# EAGLE board CAA-NMC-2-panels (EAGLE 9.2.2)
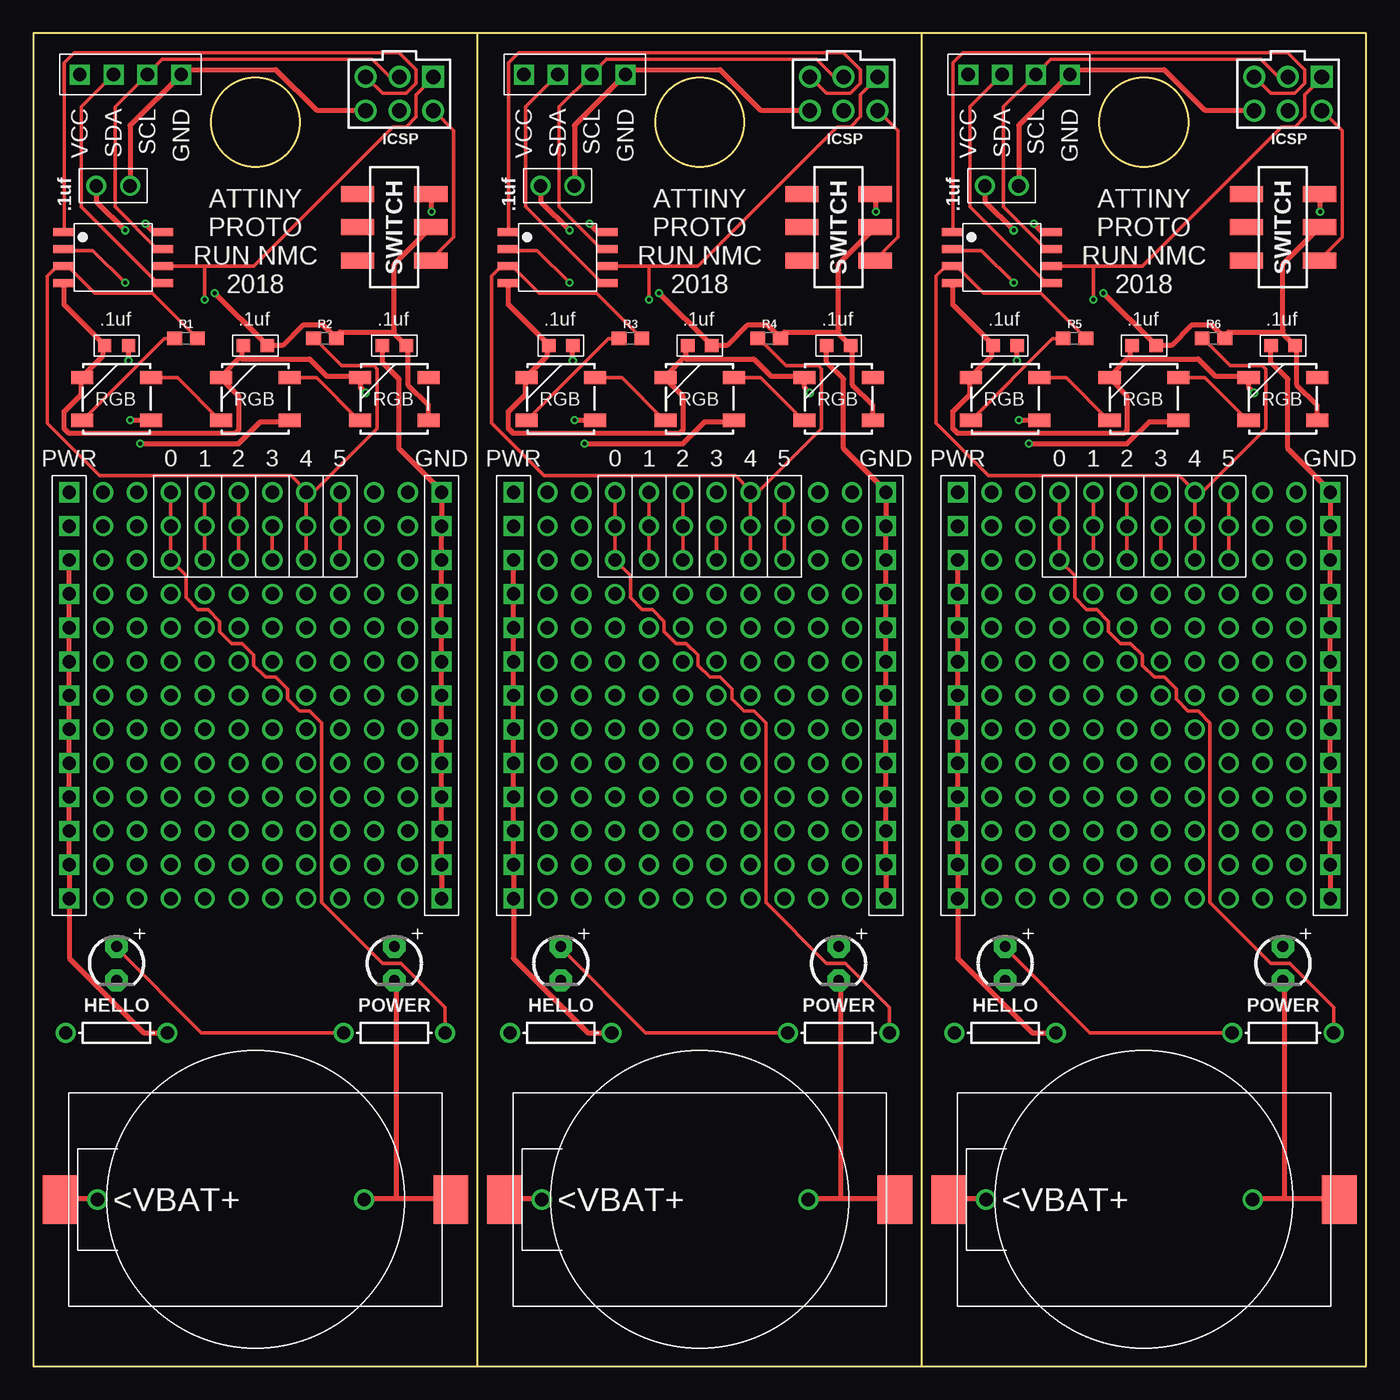
[diagram p0: board, top side]
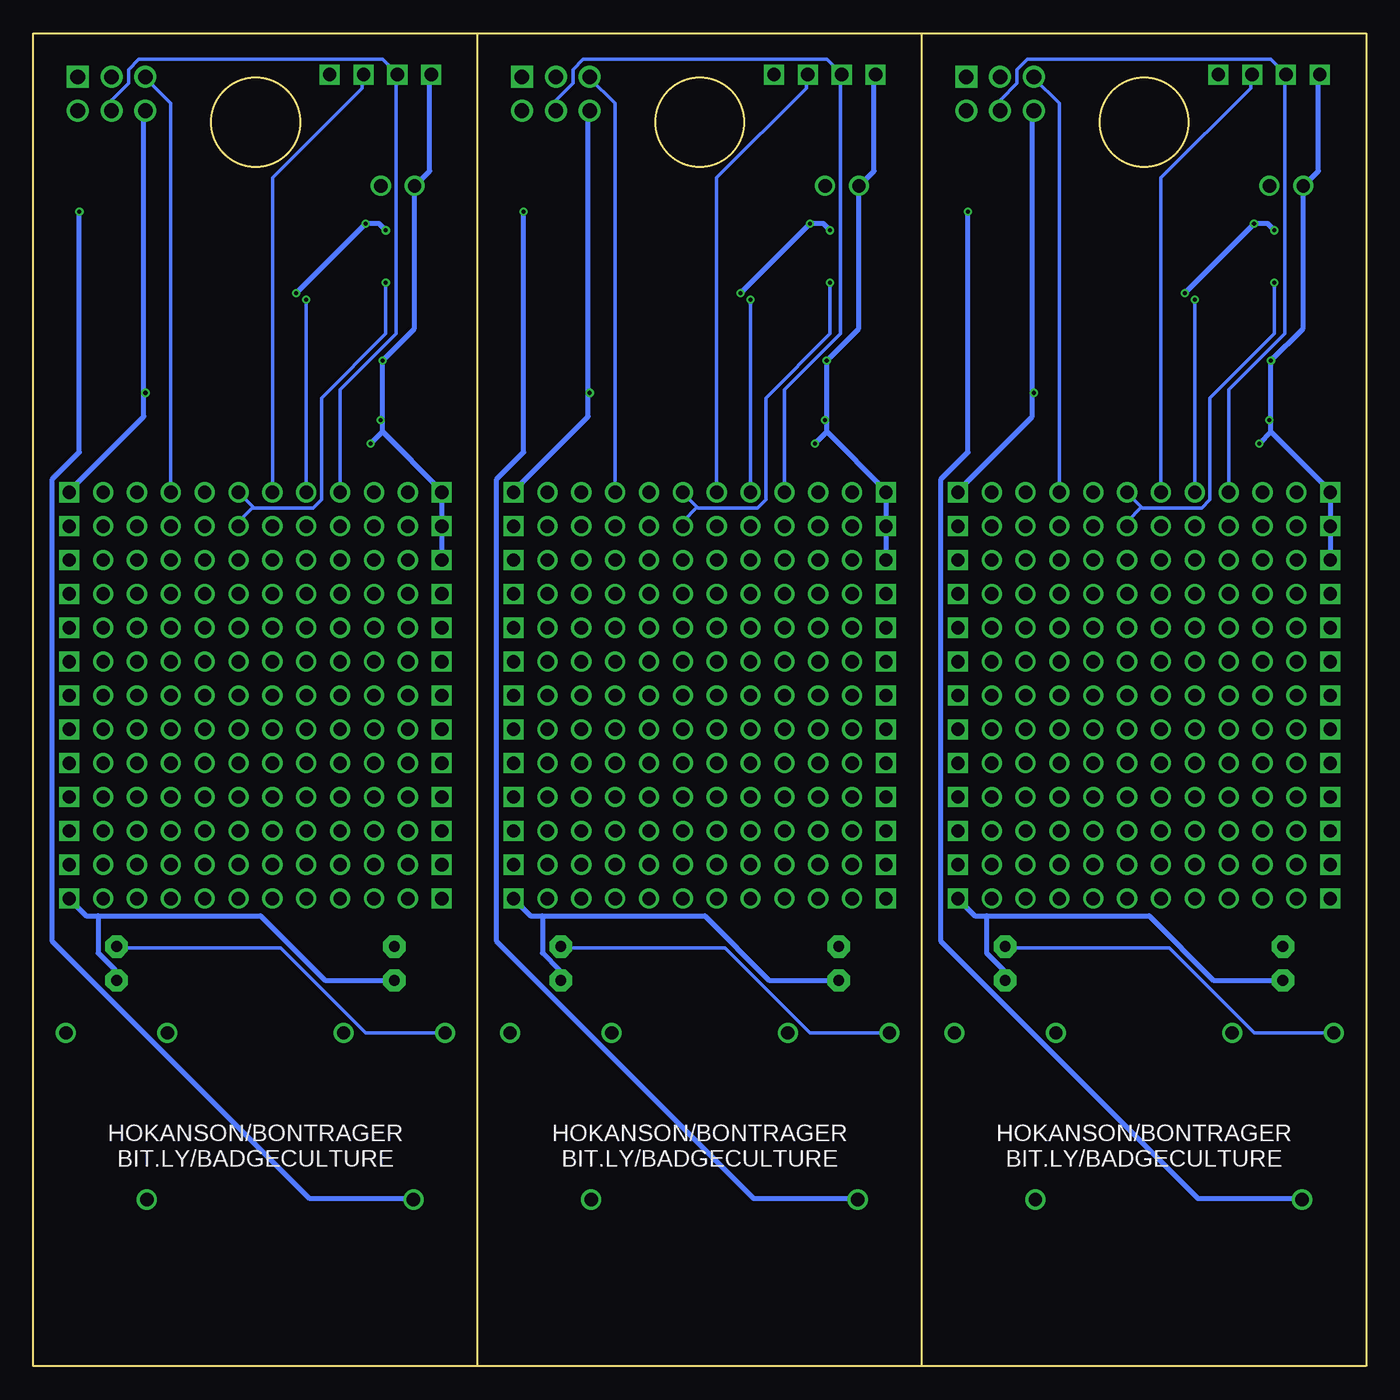
[diagram p1: board, bottom side, seen from below]

Size 100 x 100 mm. Coordinates in mm from the lower left corner, seen from the top.
Outline: 33.33,0 33.33,100
Outline: 66.67,0 66.67,100
Outline: 0,0 100,0 100,100 0,100 0,0
Outline: circle at 16.66,93.32 radius 3.33
Outline: circle at 50,93.32 radius 3.33
Outline: circle at 83.33,93.32 radius 3.33
Copper layers (1*16): Top 0.035mm / dielectric 1.5mm / Bottom 0.035mm
Design rules "SeeedStudio_2layer_DRU_no_angle_20140221": minimum track width 6mil, minimum drill 12mil, track to track 6mil, track to pad 6mil, pad to pad 6mil, via to via 6mil, smd to smd 0mil, copper to edge 10mil, drill to drill 10mil, minimum pad ring 10mil, minimum via ring 6mil, stop-mask expansion 2mil, vias tented up to drill 100mil, thermal gap 10mil
Net classes: 0 default: width 0.254 mm, clearance 0.254 mm; 1 VCC: width 0.381 mm, clearance 0.254 mm; 2 GND: width 0.381 mm, clearance 0.254 mm; 3 VBAT: width 0.381 mm, clearance 0.254 mm

## Footprints (pad centres in the part's own frame; a part is rotated, then mirrored left to right if it is on the bottom)
WS2812B = smd 1 x 1: CAP1 -0.9,4; CAP2 0.9,4 | smd 1.651 x 1: DI -2.577,-1.6; DO 2.577,1.6; GND -2.577,1.6; VCC 2.577,-1.6
LED3MM = drill 0.813 pad 1.676 octagon: NEG 1.27,0; POS -1.27,0
SOT127P798X216-8N = smd 1.5 x 0.6: GND -3.75,-1.905; PB0 3.75,-1.905; PB1 3.75,-0.635; PB2 3.75,0.635; PB3 -3.75,0.635; PB4 -3.75,-0.635; PB5 -3.75,1.905; VCC 3.75,1.905
HDRV6W64P254_2X3_762X508X868P = drill 1.1 pad 1.65: 0/MOSI/SDA 0,1.27; 2/SCK/SCL 0,3.81; 5/RST -2.54,3.81; GND -2.54,1.27; VCC 2.54,1.27 | drill 1.1 pad 1.65 square: 1/MISO 2.54,3.81
0603 = smd 1.1 x 1: 1 -0.85,0; 2 0.85,0
PROTO = drill 1: 0A -6.35,30.48; 0B -6.35,27.94; 0C -6.35,25.4; 1A -3.81,30.48; 1B -3.81,27.94; 1C -3.81,25.4; 2A -1.27,30.48; 2B -1.27,27.94; 2C -1.27,25.4; 3A 1.27,30.48; 3B 1.27,27.94; 3C 1.27,25.4; 4A 3.81,30.48; 4B 3.81,27.94; 4C 3.81,25.4; 5A 6.35,30.48; 5B 6.35,27.94; 5C 6.35,25.4; VSTRIP1 -8.89,22.86; VSTRIP2 -8.89,20.32; VSTRIP3 -8.89,17.78; VSTRIP4 -8.89,15.24; VSTRIP5 -8.89,12.7; VSTRIP6 -6.35,22.86; VSTRIP7 -6.35,20.32; VSTRIP8 -6.35,17.78; VSTRIP9 -6.35,15.24; VSTRIP10 -6.35,12.7; VSTRIP11 -11.43,10.16; VSTRIP12 -11.43,7.62; VSTRIP13 -11.43,5.08; VSTRIP14 -11.43,2.54; VSTRIP15 -11.43,0; VSTRIP16 -3.81,22.86; VSTRIP17 -3.81,20.32; VSTRIP18 -3.81,17.78; VSTRIP19 -3.81,15.24; VSTRIP20 -3.81,12.7; VSTRIP21 -1.27,22.86; VSTRIP22 -1.27,20.32; VSTRIP23 -1.27,17.78; VSTRIP24 -1.27,15.24; VSTRIP25 -1.27,12.7; VSTRIP26 1.27,22.86; VSTRIP27 1.27,20.32; VSTRIP28 1.27,17.78; VSTRIP29 1.27,15.24; VSTRIP30 1.27,12.7; VSTRIP31 3.81,22.86; VSTRIP32 3.81,20.32; VSTRIP33 3.81,17.78; VSTRIP34 3.81,15.24; VSTRIP35 3.81,12.7; VSTRIP36 6.35,22.86; VSTRIP37 6.35,20.32; VSTRIP38 6.35,17.78; VSTRIP39 6.35,15.24; VSTRIP40 6.35,12.7; VSTRIP41 8.89,22.86; VSTRIP42 8.89,20.32; VSTRIP43 8.89,17.78; VSTRIP44 8.89,15.24; VSTRIP45 8.89,12.7; VSTRIP46 11.43,22.86; VSTRIP47 11.43,20.32; VSTRIP48 11.43,17.78; VSTRIP49 11.43,15.24; VSTRIP50 11.43,12.7; VSTRIP51 -11.43,22.86; VSTRIP52 -11.43,20.32; VSTRIP53 -11.43,17.78; VSTRIP54 -11.43,15.24; VSTRIP55 -8.89,10.16; VSTRIP56 -8.89,7.62; VSTRIP57 -8.89,5.08; VSTRIP58 -8.89,2.54; VSTRIP59 -8.89,0; VSTRIP60 -11.43,12.7; VSTRIP61 -8.89,30.48; VSTRIP62 -8.89,27.94; VSTRIP63 -8.89,25.4; VSTRIP64 -11.43,30.48; VSTRIP65 -11.43,27.94; VSTRIP66 -11.43,25.4; VSTRIP67 8.89,30.48; VSTRIP68 8.89,27.94; VSTRIP69 8.89,25.4; VSTRIP70 11.43,30.48; VSTRIP71 11.43,27.94; VSTRIP72 11.43,25.4; VSTRIP75 -6.35,10.16; VSTRIP76 -6.35,7.62; VSTRIP77 -6.35,5.08; VSTRIP78 -6.35,2.54; VSTRIP79 -6.35,0; VSTRIP95 -3.81,10.16; VSTRIP96 -3.81,7.62; VSTRIP97 -3.81,5.08; VSTRIP98 -3.81,2.54; VSTRIP99 -3.81,0; VSTRIP115 -1.27,10.16; VSTRIP116 -1.27,7.62; VSTRIP117 -1.27,5.08; VSTRIP118 -1.27,2.54; VSTRIP119 -1.27,0; VSTRIP135 1.27,10.16; VSTRIP136 1.27,7.62; VSTRIP137 1.27,5.08; VSTRIP138 1.27,2.54; VSTRIP139 1.27,0; VSTRIP155 3.81,10.16; VSTRIP156 3.81,7.62; VSTRIP157 3.81,5.08; VSTRIP158 3.81,2.54; VSTRIP159 3.81,0; VSTRIP175 6.35,10.16; VSTRIP176 6.35,7.62; VSTRIP177 6.35,5.08; VSTRIP178 6.35,2.54; VSTRIP179 6.35,0; VSTRIP195 8.89,10.16; VSTRIP196 8.89,7.62; VSTRIP197 8.89,5.08; VSTRIP198 8.89,2.54; VSTRIP199 8.89,0; VSTRIP215 11.43,10.16; VSTRIP216 11.43,7.62; VSTRIP217 11.43,5.08; VSTRIP218 11.43,2.54; VSTRIP219 11.43,0 | drill 1 square: GND0 13.97,0; GND1 13.97,2.54; GND2 13.97,5.08; GND3 13.97,7.62; GND4 13.97,10.16; GND5 13.97,12.7; GND6 13.97,15.24; GND7 13.97,17.78; GND8 13.97,20.32; GND9 13.97,22.86; GND10 13.97,25.4; GND11 13.97,27.94; GND12 13.97,30.48; PWR0 -13.97,0; PWR1 -13.97,2.54; PWR2 -13.97,5.08; PWR3 -13.97,7.62; PWR4 -13.97,10.16; PWR5 -13.97,12.7; PWR6 -13.97,15.24; PWR7 -13.97,17.78; PWR8 -13.97,20.32; PWR9 -13.97,22.86; PWR10 -13.97,25.4; PWR11 -13.97,27.94; PWR12 -13.97,30.48
SMT-CR-HOLDER = smd 2.6 x 3.65: GND 14.65,0; VBAT -14.65,0
THRU-CR-HOLDER = drill 1: GND 8.15,0; VBAT -11.85,0
I2C-PADS = drill 1 square: GND 0,3.81; SCL 0,1.27; SDA 0,-1.27; VCC 0,-3.81
DECOUPLING_CAP = drill 1: P$1 0,0; P$2 2.54,0
AXIAL-0.3 = drill 1: P$3 -3.81,0; P$4 3.81,0
SMT-SWITCH = smd 1.2 x 2.5: 1 -2.5,-2.75; 2 0,-2.75; 3 2.5,-2.75; 4 -2.5,2.75; 5 0,2.75; 6 2.5,2.75

## Placement (x,y rotation side)
D1  WS2812B  [WS2812B]  6.25,72.57 0 top
D2  WS2812B  [WS2812B]  16.66,72.57 0 top
D3  WS2812B  [WS2812B]  27.09,72.57 0 top
D4  WS2812B  [WS2812B]  39.58,72.57 0 top
D5  WS2812B  [WS2812B]  49.99,72.57 0 top
D6  WS2812B  [WS2812B]  60.42,72.57 0 top
D7  WS2812B  [WS2812B]  72.92,72.57 0 top
D8  WS2812B  [WS2812B]  83.33,72.57 0 top
D9  WS2812B  [WS2812B]  93.75,72.57 0 top
HELLO  LED3MM  [LED3MM]  6.25,30.22 270 top
HELLO1  LED3MM  [LED3MM]  39.58,30.22 270 top
HELLO2  LED3MM  [LED3MM]  72.91,30.22 270 top
IC1  ATTINY85-20SU  [SOT127P798X216-8N]  5.99,83.18 0 top
IC2  ATTINY85-20SU  [SOT127P798X216-8N]  39.33,83.18 0 top
IC3  ATTINY85-20SU  [SOT127P798X216-8N]  72.66,83.18 0 top
J1  M20-9980346  [HDRV6W64P254_2X3_762X508X868P]  27.47,92.93 0 top
J2  M20-9980346  [HDRV6W64P254_2X3_762X508X868P]  60.8,92.93 0 top
J3  M20-9980346  [HDRV6W64P254_2X3_762X508X868P]  94.13,92.93 0 top
POWER  LED3MM  [LED3MM]  27.09,30.22 270 top
POWER1  LED3MM  [LED3MM]  60.42,30.22 270 top
POWER2  LED3MM  [LED3MM]  93.75,30.22 270 top
R1  470  [0603]  11.46,77.11 0 top
R2  10k  [0603]  21.88,77.11 0 top
R3  470  [0603]  44.79,77.11 0 top
R4  10k  [0603]  55.21,77.11 0 top
R5  470  [0603]  78.12,77.11 0 top
R6  10k  [0603]  88.54,77.11 0 top
U$1  PROTO  [PROTO]  16.67,35.08 0 top
U$2  SMT-BATTERY-HOLDER  [SMT-CR-HOLDER]  16.67,12.5 0 top
U$3  THRU-CR-HOLDER  [THRU-CR-HOLDER]  16.67,12.5 0 top
U$4  I2C-PADS  [I2C-PADS]  7.29,96.91 270 top
U$5  DECOUPLING_CAP  [DECOUPLING_CAP]  40.59,88.56 180 top
U$6  RESISTOR  [AXIAL-0.3]  39.58,25.01 0 top
U$7  RESISTOR  [AXIAL-0.3]  60.42,25.01 0 top
U$8  SMT-SWITCH  [SMT-SWITCH]  60.42,85.44 270 top
U$9  PROTO  [PROTO]  50,35.08 0 top
U$10  SMT-BATTERY-HOLDER  [SMT-CR-HOLDER]  50,12.5 0 top
U$11  THRU-CR-HOLDER  [THRU-CR-HOLDER]  50,12.5 0 top
U$12  I2C-PADS  [I2C-PADS]  40.62,96.91 270 top
U$13  DECOUPLING_CAP  [DECOUPLING_CAP]  73.93,88.56 180 top
U$14  RESISTOR  [AXIAL-0.3]  72.91,25.01 0 top
U$15  RESISTOR  [AXIAL-0.3]  93.75,25.01 0 top
U$16  SMT-SWITCH  [SMT-SWITCH]  93.75,85.44 270 top
U$17  PROTO  [PROTO]  83.33,35.08 0 top
U$18  SMT-BATTERY-HOLDER  [SMT-CR-HOLDER]  83.33,12.5 0 top
U$19  THRU-CR-HOLDER  [THRU-CR-HOLDER]  83.33,12.5 0 top
U$20  I2C-PADS  [I2C-PADS]  73.95,96.91 270 top
U$123  DECOUPLING_CAP  [DECOUPLING_CAP]  7.26,88.56 180 top
U$126  RESISTOR  [AXIAL-0.3]  6.25,25.01 0 top
U$127  RESISTOR  [AXIAL-0.3]  27.09,25.01 0 top
U$145  SMT-SWITCH  [SMT-SWITCH]  27.09,85.44 270 top

## Library data of the parts
D1-D9 = BadgeParts; PROD_ID: DIO-12503
HELLO HELLO1 HELLO2 POWER POWER1 POWER2 U$1-U$20 U$123 U$126 U$127 U$145 = BadgeParts
IC1-IC3 = BadgeParts; ARROW_PART_NUMBER: ATTINY85-20SU; ARROW_PRICE/STOCK: https://www.arrow.com/en/products/attiny85-20su/microchip-technology; DESCRIPTION: MICROCHIP - ATTINY85-20SU - MICROCONTROLLER MCU, 8 BIT, ATTINY, 20MHZ, SOIC-8; HEIGHT: 2.16mm; MANUFACTURER_NAME: Microchip; MANUFACTURER_PART_NUMBER: ATTINY85-20SU; RS_PART_NUMBER: 1331674; RS_PRICE/STOCK: http://uk.rs-online.com/web/p/products/1331674
J1-J3 = BadgeParts; ARROW_PART_NUMBER: M20-9980346; ARROW_PRICE/STOCK: http://uk.rs-online.com/web/p/products/7457046P; DESCRIPTION: 03+03 DIL Vertical Pin Header HARWIN M20 Series, 2.54mm Pitch 6 Way 2 Row Straight PCB Header, Solder Termination, 3A; HEIGHT: 8.68mm; MANUFACTURER_NAME: HARWIN; MANUFACTURER_PART_NUMBER: M20-9980346; RS_PART_NUMBER: 7457046P; RS_PRICE/STOCK: http://uk.rs-online.com/web/p/products/7457046P
R1 R3 R5 = SparkFun-Resistors; PROD_ID: RES-07869
R2 R4 R6 = SparkFun-Resistors; PROD_ID: RES-00824

## Nets
GND [GND]: D1.CAP1 D1.GND D2.CAP1 D2.GND D3.CAP1 D3.GND HELLO.NEG IC1.GND J1.GND POWER.NEG U$1.GND0 U$1.GND1 U$1.GND2 U$1.GND3 U$1.GND4 U$1.GND5 U$1.GND6 U$1.GND7 U$1.GND8 U$1.GND9 U$1.GND10 U$1.GND11 U$1.GND12 U$2.GND U$3.GND U$4.GND U$123.P$1
GND1 [GND]: D4.CAP1 D4.GND D5.CAP1 D5.GND D6.CAP1 D6.GND HELLO1.NEG IC2.GND J2.GND POWER1.NEG U$5.P$1 U$9.GND0 U$9.GND1 U$9.GND2 U$9.GND3 U$9.GND4 U$9.GND5 U$9.GND6 U$9.GND7 U$9.GND8 U$9.GND9 U$9.GND10 U$9.GND11 U$9.GND12 U$10.GND U$11.GND U$12.GND
GND2 [GND]: D7.CAP1 D7.GND D8.CAP1 D8.GND D9.CAP1 D9.GND HELLO2.NEG IC3.GND J3.GND POWER2.NEG U$13.P$1 U$17.GND0 U$17.GND1 U$17.GND2 U$17.GND3 U$17.GND4 U$17.GND5 U$17.GND6 U$17.GND7 U$17.GND8 U$17.GND9 U$17.GND10 U$17.GND11 U$17.GND12 U$18.GND U$19.GND U$20.GND
N$1: POWER.POS U$126.P$3
N$2: HELLO.POS U$127.P$3
N$3: D1.DO D2.DI
N$4: D2.DO D3.DI
N$5: D1.DI R1.1
N$6: POWER1.POS U$6.P$3
N$7: HELLO1.POS U$7.P$3
N$8: D4.DO D5.DI
N$9: D5.DO D6.DI
N$10: D4.DI R3.1
N$11: POWER2.POS U$14.P$3
N$12: HELLO2.POS U$15.P$3
N$13: D7.DO D8.DI
N$14: D8.DO D9.DI
N$15: D7.DI R5.1
PB0: IC1.PB0 J1.0/MOSI/SDA U$1.0A U$1.0B U$1.0C U$4.SDA U$127.P$4
PB1: IC1.PB1 J1.1/MISO U$1.1A U$1.1B U$1.1C
PB2: IC1.PB2 J1.2/SCK/SCL U$1.2A U$1.2B U$1.2C U$4.SCL
PB3: IC1.PB3 U$1.3A U$1.3B U$1.3C
PB4: IC1.PB4 R1.2 R2.1 U$1.4A U$1.4B U$1.4C
PB5: IC1.PB5 J1.5/RST U$1.5A U$1.5B U$1.5C
PB6: IC2.PB0 J2.0/MOSI/SDA U$7.P$4 U$9.0A U$9.0B U$9.0C U$12.SDA
PB7: IC2.PB3 U$9.3A U$9.3B U$9.3C
PB8: IC2.PB4 R3.2 R4.1 U$9.4A U$9.4B U$9.4C
PB9: IC2.PB2 J2.2/SCK/SCL U$9.2A U$9.2B U$9.2C U$12.SCL
PB10: IC2.PB5 J2.5/RST U$9.5A U$9.5B U$9.5C
PB11: IC2.PB1 J2.1/MISO U$9.1A U$9.1B U$9.1C
PB12: IC3.PB0 J3.0/MOSI/SDA U$15.P$4 U$17.0A U$17.0B U$17.0C U$20.SDA
PB13: IC3.PB3 U$17.3A U$17.3B U$17.3C
PB14: IC3.PB4 R5.2 R6.1 U$17.4A U$17.4B U$17.4C
PB15: IC3.PB2 J3.2/SCK/SCL U$17.2A U$17.2B U$17.2C U$20.SCL
PB16: IC3.PB5 J3.5/RST U$17.5A U$17.5B U$17.5C
PB17: IC3.PB1 J3.1/MISO U$17.1A U$17.1B U$17.1C
VBAT [VBAT]: U$2.VBAT U$3.VBAT U$145.4
VBAT1 [VBAT]: U$8.4 U$10.VBAT U$11.VBAT
VBAT2 [VBAT]: U$16.4 U$18.VBAT U$19.VBAT
VCC [VCC]: D1.CAP2 D1.VCC D2.CAP2 D2.VCC D3.CAP2 D3.VCC IC1.VCC R2.2 U$1.PWR0 U$1.PWR1 U$1.PWR2 U$1.PWR3 U$1.PWR4 U$1.PWR5 U$1.PWR6 U$1.PWR7 U$1.PWR8 U$1.PWR9 U$1.PWR10 U$1.PWR11 U$1.PWR12 U$4.VCC U$123.P$2 U$126.P$4 U$145.5
VCC1 [VCC]: D4.CAP2 D4.VCC D5.CAP2 D5.VCC D6.CAP2 D6.VCC IC2.VCC R4.2 U$5.P$2 U$6.P$4 U$8.5 U$9.PWR0 U$9.PWR1 U$9.PWR2 U$9.PWR3 U$9.PWR4 U$9.PWR5 U$9.PWR6 U$9.PWR7 U$9.PWR8 U$9.PWR9 U$9.PWR10 U$9.PWR11 U$9.PWR12 U$12.VCC
VCC2 [VCC]: D7.CAP2 D7.VCC D8.CAP2 D8.VCC D9.CAP2 D9.VCC IC3.VCC R6.2 U$13.P$2 U$14.P$4 U$16.5 U$17.PWR0 U$17.PWR1 U$17.PWR2 U$17.PWR3 U$17.PWR4 U$17.PWR5 U$17.PWR6 U$17.PWR7 U$17.PWR8 U$17.PWR9 U$17.PWR10 U$17.PWR11 U$17.PWR12 U$20.VCC
VUSB: J1.VCC U$145.6
VUSB1: J2.VCC U$8.6
VUSB2: J3.VCC U$16.6

## Tracks (layer width: path | path; a pad name or v marks a point on that pad's centre or on a via)
GND  (via drill 0.3)
  Top 0.381: IC1.GND 2.31,81.15 2.31,79.63 5.24,76.71 D1.CAP1 5.24,76.45 5.24,75.82 3.71,74.3 D1.GND 3.58,74.04 3.58,72.9 2.31,71.63 2.31,70.36 2.7,69.98 15.14,69.98 15.4,70.23 15.4,72.77 14.13,74.04 D2.GND 14.13,74.3 15.52,75.69 | 15.52,75.69 15.65,75.82 15.65,76.45 D2.CAP1 | 15.52,75.69 15.65,75.56 20.73,75.56 22,74.3 24.41,74.3 D3.GND 24.54,74.04 24.54,73.41 v24.92,73.03 | U$123.P$1 7.27,88.65 7.27,93.09 11.08,96.9 U$4.GND 11.21,97.03 11.46,97.28 18.19,97.28 21.24,94.23 24.92,94.23 J1.GND | D3.CAP1 26.19,76.45 26.19,75.31 27.46,74.04 27.46,68.83 30.64,65.66 U$1.GND12 U$1.GND11 U$1.GND10 U$1.GND9 U$1.GND8 U$1.GND7 U$1.GND6 U$1.GND5 U$1.GND4 U$1.GND3 U$1.GND2 U$1.GND1 U$1.GND0 | 27.21,12.57 31.27,12.57 U$2.GND | 27.21,12.57 24.92,12.57 U$3.GND | 27.21,12.57 27.21,28.83 POWER.NEG
  Bottom 0.381: 28.48,33.78 29.37,33.78 30.64,35.05 U$1.GND0 | 28.48,33.78 16.29,33.78 11.46,28.96 HELLO.NEG | 28.48,33.78 28.48,30.99 27.21,29.72 27.21,28.96 POWER.NEG | 25.05,73.03 25.05,71.25 30.64,65.66 U$1.GND12 | 25.05,73.03 25.05,94.11 J1.GND | v24.92,73.03 25.05,73.03
GND1  (via drill 0.3)
  Top 0.381: IC2.GND 35.65,81.15 35.65,79.63 38.57,76.71 D4.CAP1 38.57,76.45 38.57,75.82 37.05,74.3 D4.GND 36.92,74.04 36.92,72.9 35.65,71.63 35.65,70.36 36.03,69.98 48.48,69.98 48.73,70.23 48.73,72.77 47.46,74.04 D5.GND 47.46,74.3 48.86,75.69 | 48.86,75.69 48.98,75.82 48.98,76.45 D5.CAP1 | 48.86,75.69 48.98,75.56 54.06,75.56 55.33,74.3 57.75,74.3 D6.GND 57.87,74.04 57.87,73.41 v58.25,73.03 | U$5.P$1 40.6,88.65 40.6,93.09 44.41,96.9 U$12.GND 44.54,97.03 44.79,97.28 51.52,97.28 54.57,94.23 58.25,94.23 J2.GND | D6.CAP1 59.52,76.45 59.52,75.31 60.79,74.04 60.79,68.83 63.97,65.66 U$9.GND12 U$9.GND11 U$9.GND10 U$9.GND9 U$9.GND8 U$9.GND7 U$9.GND6 U$9.GND5 U$9.GND4 U$9.GND3 U$9.GND2 U$9.GND1 U$9.GND0 | 60.54,12.57 64.6,12.57 U$10.GND | 60.54,12.57 58.25,12.57 U$11.GND | 60.54,12.57 60.54,28.83 POWER1.NEG
  Bottom 0.381: 61.81,33.78 62.7,33.78 63.97,35.05 U$9.GND0 | 61.81,33.78 49.62,33.78 44.79,28.96 HELLO1.NEG | 61.81,33.78 61.81,30.99 60.54,29.72 60.54,28.96 POWER1.NEG | 58.38,73.03 58.38,71.25 63.97,65.66 U$9.GND12 | 58.38,73.03 58.38,94.11 J2.GND | v58.25,73.03 58.38,73.03
GND2  (via drill 0.3)
  Top 0.381: IC3.GND 68.98,81.15 68.98,79.63 71.9,76.71 D7.CAP1 71.9,76.45 71.9,75.82 70.38,74.3 D7.GND 70.25,74.04 70.25,72.9 68.98,71.63 68.98,70.36 69.36,69.98 81.81,69.98 82.06,70.23 82.06,72.77 80.79,74.04 D8.GND 80.79,74.3 82.19,75.69 | 82.19,75.69 82.32,75.82 82.32,76.45 D8.CAP1 | 82.19,75.69 82.32,75.56 87.4,75.56 88.67,74.3 91.08,74.3 D9.GND 91.21,74.04 91.21,73.41 v91.59,73.03 | U$13.P$1 73.93,88.65 73.93,93.09 77.74,96.9 U$20.GND 77.87,97.03 78.12,97.28 84.86,97.28 87.9,94.23 91.59,94.23 J3.GND | D9.CAP1 92.86,76.45 92.86,75.31 94.13,74.04 94.13,68.83 97.3,65.66 U$17.GND12 U$17.GND11 U$17.GND10 U$17.GND9 U$17.GND8 U$17.GND7 U$17.GND6 U$17.GND5 U$17.GND4 U$17.GND3 U$17.GND2 U$17.GND1 U$17.GND0 | 93.87,12.57 97.94,12.57 U$18.GND | 93.87,12.57 91.59,12.57 U$19.GND | 93.87,12.57 93.87,28.83 POWER2.NEG
  Bottom 0.381: 95.14,33.78 96.03,33.78 97.3,35.05 U$17.GND0 | 95.14,33.78 82.95,33.78 78.12,28.96 HELLO2.NEG | 95.14,33.78 95.14,30.99 93.87,29.72 93.87,28.96 POWER2.NEG | 91.71,73.03 91.71,71.25 97.3,65.66 U$17.GND12 | 91.71,73.03 91.71,94.11 J3.GND | v91.59,73.03 91.71,73.03
N$1
  Bottom 0.254: U$126.P$3 8.41,25.02 14.76,31.37 27.08,31.37 POWER.POS
N$2
  Top 0.254: U$127.P$3 12.6,25.02 6.25,31.37 HELLO.POS
N$3
  Top 0.254: D1.DO 8.92,74.17 10.82,74.17 14,70.99 D2.DI
N$4
  Top 0.254: D2.DO 19.33,74.17 21.24,74.17 24.41,70.99 D3.DI
N$5
  Top 0.254: R1.1 10.57,77.09 9.81,77.09 3.71,70.99 D1.DI
N$6
  Bottom 0.254: U$6.P$3 41.74,25.02 48.09,31.37 60.41,31.37 POWER1.POS
N$7
  Top 0.254: U$7.P$3 45.94,25.02 39.59,31.37 HELLO1.POS
N$8
  Top 0.254: D4.DO 42.25,74.17 44.16,74.17 47.33,70.99 D5.DI
N$9
  Top 0.254: D5.DO 52.67,74.17 54.57,74.17 57.75,70.99 D6.DI
N$10
  Top 0.254: R3.1 43.9,77.09 43.14,77.09 37.05,70.99 D4.DI
N$11
  Bottom 0.254: U$14.P$3 75.08,25.02 81.43,31.37 93.75,31.37 POWER2.POS
N$12
  Top 0.254: U$15.P$3 79.27,25.02 72.92,31.37 HELLO2.POS
N$13
  Top 0.254: D7.DO 75.58,74.17 77.49,74.17 80.67,70.99 D8.DI
N$14
  Top 0.254: D8.DO 86,74.17 87.9,74.17 91.08,70.99 D9.DI
N$15
  Top 0.254: R5.1 77.24,77.09 76.47,77.09 70.38,70.99 D7.DI
PB0
  Top 0.254: IC1.PB0 9.68,81.28 9.3,81.28 3.58,87 3.58,94.49 6,96.9 U$4.SDA | U$127.P$4 30.89,26.92 27.59,30.23 26.19,30.23 21.62,34.8 21.62,48.26 20.73,49.15 19.97,49.15 19.08,50.04 19.08,50.8 18.19,51.69 17.43,51.69 16.54,52.58 16.54,53.34 15.65,54.23 14.89,54.23 14,55.12 14,55.88 13.11,56.77 12.35,56.77 11.46,57.66 11.46,59.31 10.32,60.45 U$1.0C U$1.0B U$1.0A
  Bottom 0.254: J1.0/MOSI/SDA 27.46,94.23 27.46,95 26.19,96.27 26.19,97.28 25.43,98.04 7.14,98.04 6.12,97.03 U$4.SDA 6.12,96.9 6.12,77.47 10.32,73.28 U$1.0A
PB1  (via drill 0.3)
  Top 0.254: U$1.1C U$1.1B U$1.1A | 12.86,82.55 16.54,82.55 26.95,92.96 27.97,92.96 28.73,93.73 28.73,95.38 30,96.65 J1.1/MISO | 12.86,82.55 9.81,82.55 IC1.PB1 | 12.86,82.55 v12.86,80.01
  Bottom 0.254: v12.86,80.01 U$1.1A
PB2
  Top 0.254: U$1.2C U$1.2B U$1.2A | IC1.PB2 9.68,83.82 9.3,83.82 6.12,87 6.12,94.49 8.54,96.9 U$4.SCL 8.66,97.03 9.68,98.04 25.43,98.04 26.7,96.77 27.46,96.77 J1.2/SCK/SCL
  Bottom 0.254: U$1.2A 15.4,89.15 8.66,95.89 8.66,96.9 U$4.SCL
PB3  (via drill 0.3)
  Top 0.254: U$1.3B U$1.3C | v6.89,81.28 4.47,83.69 2.31,83.69 IC1.PB3
  Bottom 0.254: v6.89,81.28 6.89,77.47 11.71,72.64 11.71,65.02 12.35,64.39 16.79,64.39 16.86,64.45 | 16.86,64.45 17.94,65.53 U$1.3A | U$1.3B 17.94,63.37 16.86,64.45
PB4
  Top 0.254: R1.2 12.22,77.22 8.92,80.52 4.6,80.52 2.7,82.42 2.31,82.42 IC1.PB4 2.19,82.42 1.68,82.42 1.04,81.79 1.04,70.74 4.98,66.8 19.33,66.8 20.48,65.66 | U$1.4C U$1.4B U$1.4A 20.48,65.66 | 20.48,65.66 21.11,65.66 25.81,70.36 25.81,74.8 25.56,75.06 23.14,75.06 21.11,77.09 R2.1
PB5
  Top 0.254: U$1.5C U$1.5B U$1.5A | IC1.PB5 2.31,85.09 2.31,97.79 3.08,98.55 27.46,98.55 28.73,97.28 28.73,96.27 27.97,95.5 26.19,95.5 25.05,96.65 J1.5/RST
  Bottom 0.254: U$1.5A 23.02,94.74 24.92,96.65 J1.5/RST
PB6
  Top 0.254: IC2.PB0 43.01,81.28 42.63,81.28 36.92,87 36.92,94.49 39.33,96.9 U$12.SDA | U$7.P$4 64.22,26.92 60.92,30.23 59.52,30.23 54.95,34.8 54.95,48.26 54.06,49.15 53.3,49.15 52.41,50.04 52.41,50.8 51.52,51.69 50.76,51.69 49.87,52.58 49.87,53.34 48.98,54.23 48.22,54.23 47.33,55.12 47.33,55.88 46.44,56.77 45.68,56.77 44.79,57.66 44.79,59.31 43.65,60.45 U$9.0C U$9.0B U$9.0A
  Bottom 0.254: J2.0/MOSI/SDA 60.79,94.23 60.79,95 59.52,96.27 59.52,97.28 58.76,98.04 40.47,98.04 39.46,97.03 U$12.SDA 39.46,96.9 39.46,77.47 43.65,73.28 U$9.0A
PB7  (via drill 0.3)
  Top 0.254: U$9.3B U$9.3C | v40.22,81.28 37.81,83.69 35.65,83.69 IC2.PB3
  Bottom 0.254: v40.22,81.28 40.22,77.47 45.05,72.64 45.05,65.02 45.68,64.39 50.13,64.39 50.19,64.45 | 50.19,64.45 51.27,65.53 U$9.3A | U$9.3B 51.27,63.37 50.19,64.45
PB8
  Top 0.254: R3.2 45.55,77.22 42.25,80.52 37.93,80.52 36.03,82.42 35.65,82.42 IC2.PB4 35.52,82.42 35.01,82.42 34.38,81.79 34.38,70.74 38.31,66.8 52.67,66.8 53.81,65.66 | U$9.4C U$9.4B U$9.4A 53.81,65.66 | 53.81,65.66 54.44,65.66 59.14,70.36 59.14,74.8 58.89,75.06 56.48,75.06 54.44,77.09 R4.1
PB9
  Top 0.254: U$9.2C U$9.2B U$9.2A | IC2.PB2 43.01,83.82 42.63,83.82 39.46,87 39.46,94.49 41.87,96.9 U$12.SCL 42,97.03 43.01,98.04 58.76,98.04 60.03,96.77 60.79,96.77 J2.2/SCK/SCL
  Bottom 0.254: U$9.2A 48.73,89.15 42,95.89 42,96.9 U$12.SCL
PB10
  Top 0.254: U$9.5C U$9.5B U$9.5A | IC2.PB5 35.65,85.09 35.65,97.79 36.41,98.55 60.79,98.55 62.06,97.28 62.06,96.27 61.3,95.5 59.52,95.5 58.38,96.65 J2.5/RST
  Bottom 0.254: U$9.5A 56.35,94.74 58.25,96.65 J2.5/RST
PB11  (via drill 0.3)
  Top 0.254: U$9.1C U$9.1B U$9.1A | 46.19,82.55 49.87,82.55 60.29,92.96 61.3,92.96 62.06,93.73 62.06,95.38 63.33,96.65 J2.1/MISO | 46.19,82.55 43.14,82.55 IC2.PB1 | 46.19,82.55 v46.19,80.01
  Bottom 0.254: v46.19,80.01 U$9.1A
PB12
  Top 0.254: IC3.PB0 76.35,81.28 75.97,81.28 70.25,87 70.25,94.49 72.66,96.9 U$20.SDA | U$15.P$4 97.56,26.92 94.25,30.23 92.86,30.23 88.28,34.8 88.28,48.26 87.4,49.15 86.63,49.15 85.75,50.04 85.75,50.8 84.86,51.69 84.09,51.69 83.2,52.58 83.2,53.34 82.32,54.23 81.55,54.23 80.67,55.12 80.67,55.88 79.78,56.77 79.01,56.77 78.12,57.66 78.12,59.31 76.98,60.45 U$17.0C U$17.0B U$17.0A
  Bottom 0.254: J3.0/MOSI/SDA 94.13,94.23 94.13,95 92.86,96.27 92.86,97.28 92.09,98.04 73.81,98.04 72.79,97.03 U$20.SDA 72.79,96.9 72.79,77.47 76.98,73.28 U$17.0A
PB13  (via drill 0.3)
  Top 0.254: U$17.3B U$17.3C | v73.55,81.28 71.14,83.69 68.98,83.69 IC3.PB3
  Bottom 0.254: v73.55,81.28 73.55,77.47 78.38,72.64 78.38,65.02 79.01,64.39 83.46,64.39 83.52,64.45 | 83.52,64.45 84.6,65.53 U$17.3A | U$17.3B 84.6,63.37 83.52,64.45
PB14
  Top 0.254: R5.2 78.89,77.22 75.58,80.52 71.27,80.52 69.36,82.42 68.98,82.42 IC3.PB4 68.85,82.42 68.35,82.42 67.71,81.79 67.71,70.74 71.65,66.8 86,66.8 87.14,65.66 | U$17.4C U$17.4B U$17.4A 87.14,65.66 | 87.14,65.66 87.78,65.66 92.48,70.36 92.48,74.8 92.22,75.06 89.81,75.06 87.78,77.09 R6.1
PB15
  Top 0.254: U$17.2C U$17.2B U$17.2A | IC3.PB2 76.35,83.82 75.97,83.82 72.79,87 72.79,94.49 75.2,96.9 U$20.SCL 75.33,97.03 76.35,98.04 92.09,98.04 93.36,96.77 94.13,96.77 J3.2/SCK/SCL
  Bottom 0.254: U$17.2A 82.06,89.15 75.33,95.89 75.33,96.9 U$20.SCL
PB16
  Top 0.254: U$17.5C U$17.5B U$17.5A | IC3.PB5 68.98,85.09 68.98,97.79 69.74,98.55 94.13,98.55 95.4,97.28 95.4,96.27 94.64,95.5 92.86,95.5 91.71,96.65 J3.5/RST
  Bottom 0.254: U$17.5A 89.68,94.74 91.59,96.65 J3.5/RST
PB17  (via drill 0.3)
  Top 0.254: U$17.1C U$17.1B U$17.1A | 79.52,82.55 83.2,82.55 93.62,92.96 94.64,92.96 95.4,93.73 95.4,95.38 96.67,96.65 J3.1/MISO | 79.52,82.55 76.47,82.55 IC3.PB1 | 79.52,82.55 v79.52,80.01
  Bottom 0.254: v79.52,80.01 U$17.1A
VBAT  (via drill 0.3)
  Top 0.381: v29.87,86.61 29.87,87.88 U$145.4 | U$2.VBAT 2.06,12.57 4.73,12.57 U$3.VBAT
  Bottom 0.381: v29.87,86.61 29.87,68.58 31.91,66.55 31.91,31.88 12.6,12.57 4.86,12.57 U$3.VBAT
VBAT1  (via drill 0.3)
  Top 0.381: v63.21,86.61 63.21,87.88 U$8.4 | U$10.VBAT 35.39,12.57 38.06,12.57 U$11.VBAT
  Bottom 0.381: v63.21,86.61 63.21,68.58 65.24,66.55 65.24,31.88 45.94,12.57 38.19,12.57 U$11.VBAT
VBAT2  (via drill 0.3)
  Top 0.381: v96.54,86.61 96.54,87.88 U$16.4 | U$18.VBAT 68.73,12.57 71.39,12.57 U$19.VBAT
  Bottom 0.381: v96.54,86.61 96.54,68.58 98.57,66.55 98.57,31.88 79.27,12.57 71.52,12.57 U$19.VBAT
VCC  (via drill 0.3)
  Top 0.381: U$1.PWR10 U$1.PWR9 U$1.PWR8 U$1.PWR7 U$1.PWR6 U$1.PWR5 U$1.PWR4 U$1.PWR3 U$1.PWR2 U$1.PWR1 U$1.PWR0 2.7,30.61 8.28,25.02 9.94,25.02 U$126.P$4 | 26.95,77.6 27.97,76.58 D3.CAP2 28.1,76.45 28.1,73.66 29.62,72.14 29.62,70.99 D3.VCC | 26.95,77.6 23.02,77.6 22.76,77.34 R2.2 22.64,77.22 21.75,78.11 20.22,78.11 18.7,76.58 17.68,76.58 D2.CAP2 17.43,76.71 v13.62,80.52 | U$145.5 29.75,85.34 27.08,82.68 27.08,77.72 26.95,77.6 | v8.41,85.72 9.05,85.09 9.68,85.09 IC1.VCC | v6.89,85.22 4.73,87.38 4.73,88.52 U$123.P$2 | v7.14,75.44 7.14,76.45 D1.CAP2 | v7.27,70.99 8.79,70.99 D1.VCC | v8.03,69.22 15.4,69.22 17.05,70.87 19.21,70.87 D2.VCC
  Bottom 0.381: v6.89,85.22 7.39,85.72 v8.41,85.72 v13.62,80.52 | U$4.VCC 3.58,96.9 3.58,89.66 4.6,88.65 U$123.P$2 4.73,88.39 4.73,77.85 v7.14,75.44 7.14,70.99 | 7.14,70.1 7.14,70.99 | 7.14,70.1 2.7,65.66 U$1.PWR12 U$1.PWR11 U$1.PWR10 | v7.27,70.99 7.14,70.99 | 7.14,70.1 v8.03,69.22
VCC1  (via drill 0.3)
  Top 0.381: U$9.PWR10 U$9.PWR9 U$9.PWR8 U$9.PWR7 U$9.PWR6 U$9.PWR5 U$9.PWR4 U$9.PWR3 U$9.PWR2 U$9.PWR1 U$9.PWR0 36.03,30.61 41.62,25.02 43.27,25.02 U$6.P$4 | 60.29,77.6 61.3,76.58 D6.CAP2 61.43,76.45 61.43,73.66 62.95,72.14 62.95,70.99 D6.VCC | 60.29,77.6 56.35,77.6 56.09,77.34 R4.2 55.97,77.22 55.08,78.11 53.55,78.11 52.03,76.58 51.02,76.58 D5.CAP2 50.76,76.71 v46.95,80.52 | U$8.5 63.08,85.34 60.41,82.68 60.41,77.72 60.29,77.6 | v41.74,85.72 42.38,85.09 43.01,85.09 IC2.VCC | v40.22,85.22 38.06,87.38 38.06,88.52 U$5.P$2 | v40.47,75.44 40.47,76.45 D4.CAP2 | v40.6,70.99 42.12,70.99 D4.VCC | v41.36,69.22 48.73,69.22 50.38,70.87 52.54,70.87 D5.VCC
  Bottom 0.381: v40.22,85.22 40.73,85.72 v41.74,85.72 v46.95,80.52 | U$12.VCC 36.92,96.9 36.92,89.66 37.93,88.65 U$5.P$2 38.06,88.39 38.06,77.85 v40.47,75.44 40.47,70.99 | 40.47,70.1 40.47,70.99 | 40.47,70.1 36.03,65.66 U$9.PWR12 U$9.PWR11 U$9.PWR10 | v40.6,70.99 40.47,70.99 | 40.47,70.1 v41.36,69.22
VCC2  (via drill 0.3)
  Top 0.381: U$17.PWR10 U$17.PWR9 U$17.PWR8 U$17.PWR7 U$17.PWR6 U$17.PWR5 U$17.PWR4 U$17.PWR3 U$17.PWR2 U$17.PWR1 U$17.PWR0 69.36,30.61 74.95,25.02 76.6,25.02 U$14.P$4 | 93.62,77.6 94.64,76.58 D9.CAP2 94.76,76.45 94.76,73.66 96.29,72.14 96.29,70.99 D9.VCC | 93.62,77.6 89.68,77.6 89.43,77.34 R6.2 89.3,77.22 88.41,78.11 86.89,78.11 85.36,76.58 84.35,76.58 D8.CAP2 84.09,76.71 v80.28,80.52 | U$16.5 96.41,85.34 93.75,82.68 93.75,77.72 93.62,77.6 | v75.08,85.72 75.71,85.09 76.35,85.09 IC3.VCC | v73.55,85.22 71.39,87.38 71.39,88.52 U$13.P$2 | v73.81,75.44 73.81,76.45 D7.CAP2 | v73.93,70.99 75.46,70.99 D7.VCC | v74.7,69.22 82.06,69.22 83.71,70.87 85.87,70.87 D8.VCC
  Bottom 0.381: v73.55,85.22 74.06,85.72 v75.08,85.72 v80.28,80.52 | U$20.VCC 70.25,96.9 70.25,89.66 71.27,88.65 U$13.P$2 71.39,88.39 71.39,77.85 v73.81,75.44 73.81,70.99 | 73.81,70.1 73.81,70.99 | 73.81,70.1 69.36,65.66 U$17.PWR12 U$17.PWR11 U$17.PWR10 | v73.93,70.99 73.81,70.99 | 73.81,70.1 v74.7,69.22
VUSB
  Top 0.254: U$145.6 29.87,83.06 31.52,84.71 31.52,92.71 30.13,94.11 J1.VCC
VUSB1
  Top 0.254: U$8.6 63.21,83.06 64.86,84.71 64.86,92.71 63.46,94.11 J2.VCC
VUSB2
  Top 0.254: U$16.6 96.54,83.06 98.19,84.71 98.19,92.71 96.79,94.11 J3.VCC

## Text on the board
Dimension: <- V cut | <- V cut
tPlace: .1uf | .1uf | .1uf | ATTINY / PROTO / RUN NMC / 2018 | ATTINY / PROTO / RUN NMC / 2018 | ATTINY / PROTO / RUN NMC / 2018 | HELLO | POWER | HELLO | POWER | HELLO | POWER
bPlace: HOKANSON/BONTRAGER / BIT.LY/BADGECULTURE | HOKANSON/BONTRAGER / BIT.LY/BADGECULTURE | HOKANSON/BONTRAGER / BIT.LY/BADGECULTURE